# Altium PCB Battery-Cutoff.PcbDoc
Units mil, origin at the board's own origin, x right, y up, seen from the top; angles counter-clockwise.
Board outline 2362.2 x 984.25 mil, 2 copper layers (Top Layer, Bottom Layer); 9 components, 6 nets, 38 pads, 5 vias.
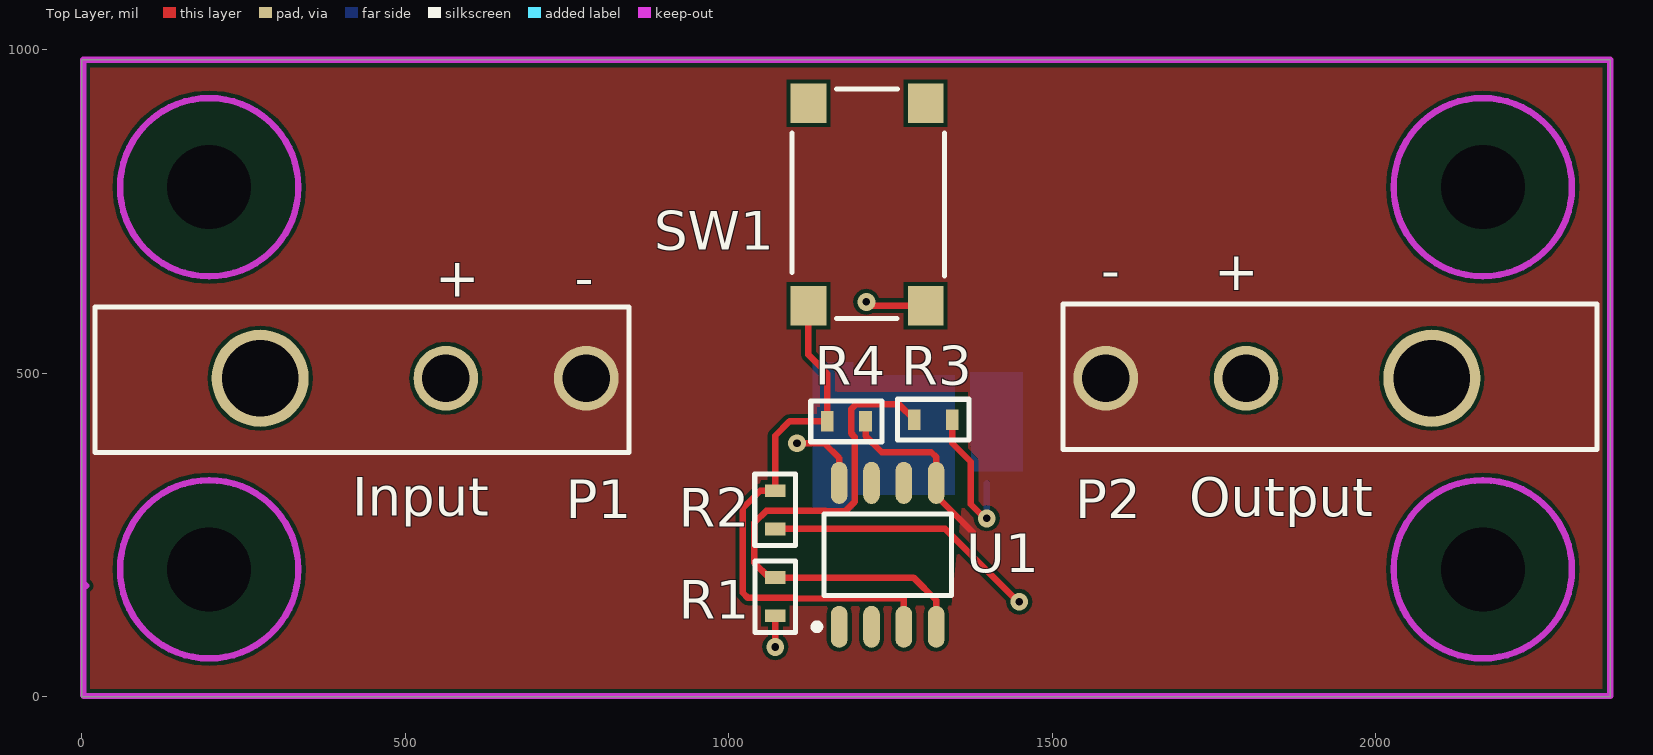
[diagram p0: Top Layer view]
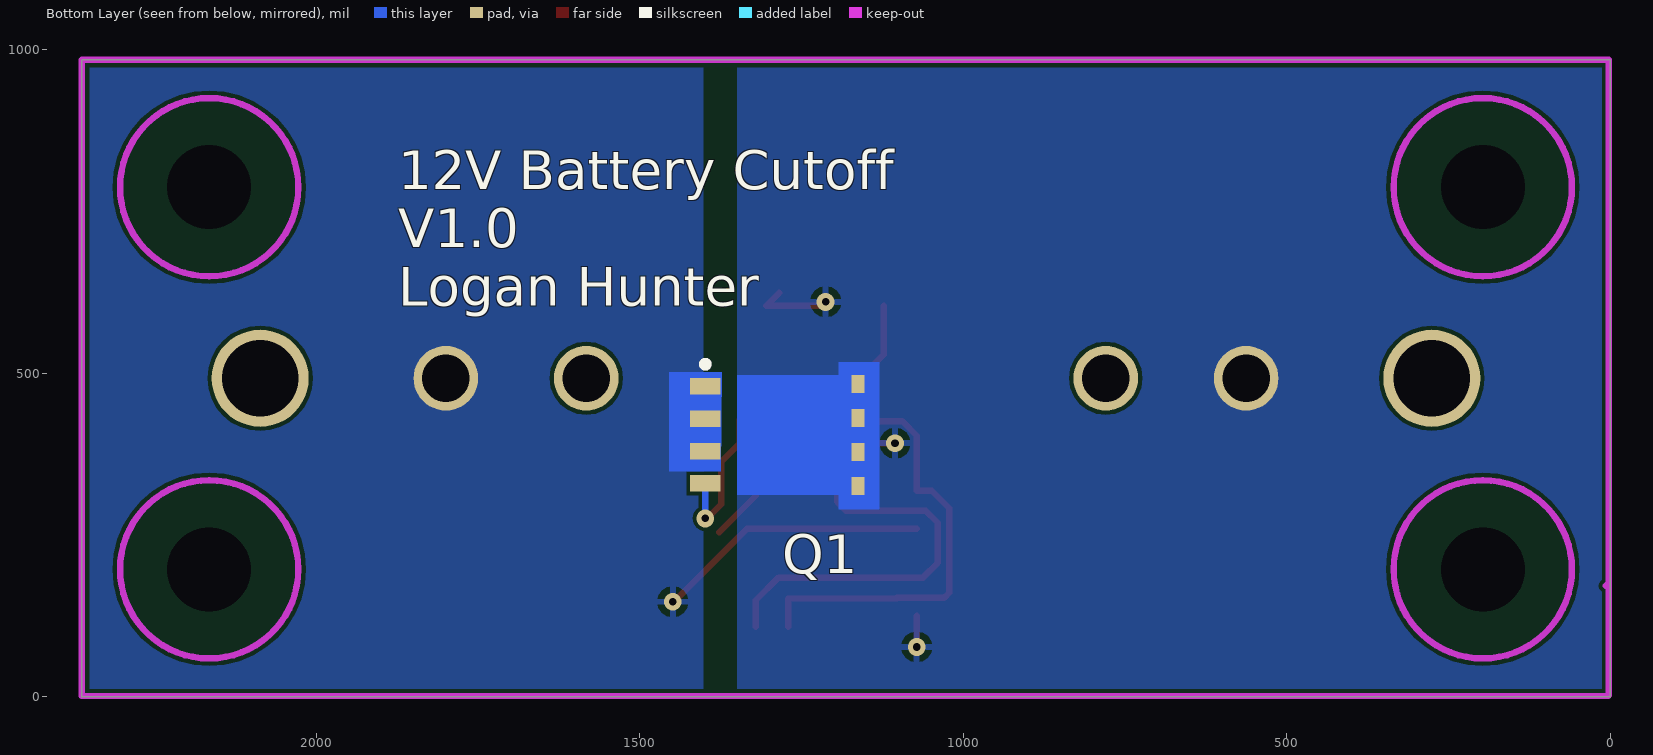
[diagram p1: Bottom Layer view, seen from below]
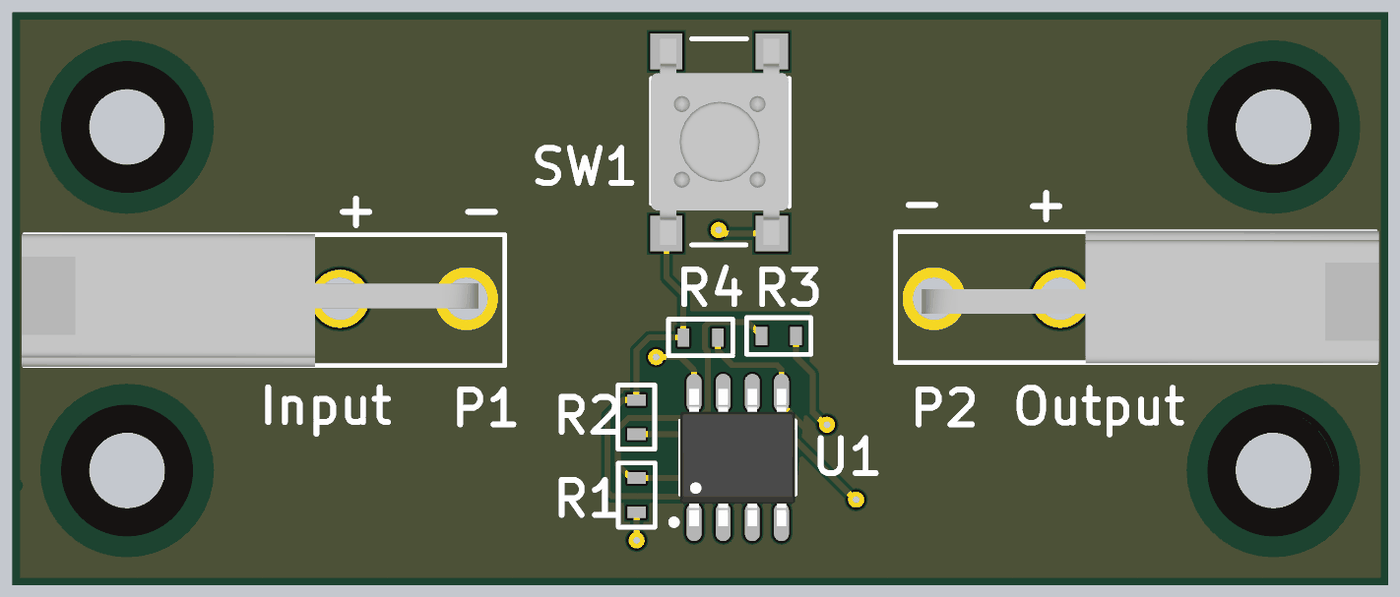
[diagram p2: 3D render of the assembled board from above, using the file's embedded part models]

## Layer stack, top to bottom
Top Solder: solder mask 0.4, Solder Resist, Dk 3.5
Top Layer: signal copper 1.4
Dielectric 1: dielectric 12.6, FR-4, Dk 4.8
Bottom Layer: signal copper 1.4
Bottom Solder: solder mask 0.4, Solder Resist, Dk 3.5

## Board outline
0,0 2362.2,0 2362.2,984.25 0,984.25

## Design rules (kind name [scope] priority, off if disabled: settings)
BoardOutlineClearance [All] p1: gap=11.81
Clearance [All] p1: gap=6
ComponentClearance [All] p1: gap=3.94 collisioncheckmode=3 verticalgap=10 showdistances=FALSE
FabricationTestPointUsage TestPointUsage [All] p1: valid=0 allowmultiple=FALSE
FabricationTestpoint Testpoint [All] p1: side=3 testpointundercomponent=TRUE minsize=40 maxsize=100 preferedsize=60 minholesize=0 maxholesize=40 preferedholesize=32 testpointgrid=1 allowsidetop=TRUE allowsidebottom=TRUE usegrid=TRUE gridtolerance=0.01
HoleSize [All] p1: absolutevalues=TRUE maxlimit=248.03 minlimit=11.81 maxpercent=80.000 minpercent=20.000
HoleToHoleClearance [All] p1: gap=17.72 allowstackedmicrovias=TRUE
MinimumAnnularRing [All] p1: minimumring=5.91
MinimumSolderMaskSliver [All] p1: minsoldermaskwidth=2.95
PlaneClearance [All] p1: clearance=19.68
PlaneConnect [All] p1: planeconnectstyle=Direct reliefexpansion=20 reliefentries=4 reliefconductorwidth=10 reliefairgap=10
PolygonConnect ThroughHole [IsThruPin] p1: connectstyle=Direct reliefconductorwidth=10 reliefentries=4 polygonreliefangle="90 Angle" airgapwidth=10
PolygonConnect "GND Via" [isVia AND InNet('GND')] p2: connectstyle=Direct reliefconductorwidth=10 reliefentries=4 polygonreliefangle="90 Angle" airgapwidth=10 // GND Via Connection
PolygonConnect [All] p3: connectstyle=Relief reliefconductorwidth=10 reliefentries=4 polygonreliefangle="90 Angle" airgapwidth=9.84
RoutingVias [All] p1: holewidth=11.81 width=23.62 viastyle="Through Hole" minholewidth=11.81 minwidth=23.62 maxholewidth=248.03 maxwidth=259.84
SilkToSilkClearance [All] p1: silktosilkclearance=5.91
SilkToSolderMaskClearance SilkscreenOverComponentPads [IsPad] p1: minsilkscreentomaskgap=9.84 clearancetoexposedcopper=TRUE
SolderMaskExpansion [All] p1: expansion=3.94
Width [All] p1: maxlimit=78.74 minlimit=6 preferedwidth=9.84 minimp=50.000000 maximp=50.000000 favimp=50.000000
20 further rules are at their usual default settings.

## Components (designator, comment, footprint, x,y, rotation, side; value= is the part's Value field where it differs from the comment)
P1 "Molex Mini-Fit 1x2" "Molex Mini-Fit Jr 2x1" 275.59,492.13 r270 top
P2 "Molex Mini-Fit 1x2" "Molex Mini-Fit Jr 2x1" 2086.61,492.13 r90 top
Q1 "INFINEON BSC030P03NS3 G" "BSC030P03NS3 G" 1280.51,404.53 r0 bottom
R1 "SCH_GENERIC_RESISTOR_0603" PCB_GENERIC_SMD_0603 1071.85,154.53 r270 top
R2 "SCH_GENERIC_RESISTOR_0603" PCB_GENERIC_SMD_0603 1071.54,288.72 r270 top
R3 "SCH_GENERIC_RESISTOR_0603" PCB_GENERIC_SMD_0603 1315.95,428.15 r0 top
R4 "SCH_GENERIC_RESISTOR_0603" PCB_GENERIC_SMD_0603 1181.76,425.51 r0 top
SW1 "Tactile Switch" "C&K 4 pin Tactile Switch" 1304.13,604.33 r90 top
U1 "Maxim MAX8212" "Maxim MAX8212" 1245.55,219.21 r90 top

## Footprints (in the part's own frame and the unit in brackets; to place one, negate y for a bottom-side part, rotate by r counter-clockwise, add the part's x,y. Pads: shape width x height; smd on the part's side, far side on the other; paste and mask are expansions set on the pad)
"BSC030P03NS3 G" [mm] "P-Channel 30V 25.4A (Ta), 100A (Tc) 2.5W (Ta), 125W (Tc) Surface Mount PG-TDSON-8"
  rect 1.2x0.65 smd: 1(3,-1.905) 2(3,-0.635) 3(3,0.635) 4(3,1.905)
  rect 0.5x0.703 smd: 5(-3,1.999) 6(-3,0.666) 7(-3,-0.666) 8(-3,-1.999)
  Top Layer region: -2.75,2.35 1.75,2.35 1.75,-2.35 -2.75,-2.35
  silkscreen extent 2.88,-2.9 3.13,-2.65
"C&K 4 pin Tactile Switch" [mm] "Digikey: CKN9085CT-ND MFG: PTS645SH50SMTR92 LFS"
  rect 1.55x1.4 smd mask+0.1: 1(0,4.6)
  rect 1.55x1.4 smd: 2(7.95,4.6) 3(0,0) 4(7.95,0)
  silkscreen extent -0.5,-0.75 8.5,5.25, body extent -0.5,-0.72 8.5,5.28, height 5
"Maxim MAX8212" [mm] "MFG: MAX8212CSA+ Digikey:  MAX8212CSA+-ND"
  oval 1.65x0.65 smd: 1(-2.825,1.905) 2(-2.825,0.635) 3(-2.825,-0.635) 4(-2.825,-1.905) 5(2.825,-1.905) 6(2.825,-0.635) 7(2.825,0.635) 8(2.825,1.905)
  silkscreen extent -2.95,-2.5 1.6,2.9, body extent -3,-2.5 3,2.5, height 1.75
"Molex Mini-Fit Jr 2x1" [mil]
  round 100 hole 73: 1(0,287) 2(0,504)
  round 150 hole 118: ""(0,0)
  silkscreen extent -110,-255 115,570, body extent -111,-260 117,525, height 449
PCB_GENERIC_SMD_0603 [mm]
  rect 0.5x0.8 smd: 1(-0.75,0) 2(0.75,0)
  silkscreen extent -1.4,-0.8 1.4,0.8, body extent -0.75,-0.5 0.75,0.5, height 0.45

## Part data
Q1: library part "BSC030P03NS3 G", "P-Channel 30V 25.4A (Ta), 100A (Tc) 2.5W (Ta), 125W (Tc) Surface Mount PG-TDSON-8"
R1 R2 R3 R4: "Generic SMD resistor 0603"
SW1: library part "C&K Tactile Switch"

## Free pads (board coordinates)
  round 0 hole 129.92 unplated: ""(196.85,196.85) ""(196.85,787.4) ""(2165.35,196.85) ""(2165.35,787.4)

## Via types
v1: diameter 27.56, hole 11.81, Top Layer to Bottom Layer, 5 vias

## Nets (pads, with @x,y where several pads share a name; then routed paths per layer and width w, separated by ;. In a path a pad name is that pad's centre, name@x,y a point inside that pad or via, vN(x,y) a via of type N, cw(c..) or ccw(c..) an arc to the next point about the centre after c; other vN are vias at no path point)
GND: P1.2 P2.2 R4.2 U1.5 | length 285.2
  Top Layer w10: R4.2 1211.29,402.88 1236.22,377.95 1312.99,377.95 1320.55,370.39 U1.5 1320.55,310.35 1376.97,253.94
NetP1_1: P1.1 Q1.5 Q1.6 Q1.7 Q1.8 R1.2 SW1.3 U1.8 | length 283.2
  Top Layer w10: v1(1071.85,76.77) R1.2 ; v1(1105.32,391.73) 1147.64,391.73 1170.55,368.82 U1.8 ; v1(1212.6,610.24) 1218.5,604.33 SW1.3 SW1.3@1284.45,624.02
NetP2_1: P2.1 Q1.1 Q1.2 Q1.3 R2.2 | length 423.9
  Top Layer w10: R2.2 1334.31,259.19 1446.85,146.65 v1(1448.82,146.65)
NetQ1_4: Q1.4 R3.2 | length 230.2
  Top Layer w10: R3.2 1345.48,391.72 1374.02,363.18 1374.02,297.24 1395.67,275.59 v1(1398.62,275.59)
  Bottom Layer w10: v1(1398.62,275.59) Q1.4
NetR1_1: R1.1 R3.1 U1.4 | length 833.1
  Top Layer w10: R3.1 1262.31,452.26 1196.89,452.26 1188.98,444.34 1188.98,407.48 1190.45,406.01 1190.45,405.21 1194.35,401.31 1194.35,300.89 1180.41,286.95 1149.2,286.95 1148.75,287.4 1058.07,287.4 1039.37,268.7 1039.37,206.69 1062,184.06 R1.1 1285.43,184.06 1320.55,148.94 U1.4
NetR2_1: R2.1 R4.1 SW1.1 U1.3 | length 853.6
  Top Layer w10: 1102.29,151.69 1270.55,151.69 U1.3 ; 1102.29,152.56 1029.53,152.56 1021.65,160.43 1021.65,291.34 1048.56,318.25 R2.1 1071.54,403.23 1093.82,425.51 R4.1 1152.24,499.34 1123.03,528.54 SW1.1
pads on no net: P1. P2. SW1.2 SW1.4 U1.1 U1.2 U1.6 U1.7

## Polygon pours and split planes (outlines as drawn)
NetP1_1 on Bottom Layer "12VIn" (solid, remove dead copper, pour order 8): 0,984.25 1349.41,984.25 1349.41,0 0,0
NetP2_1 on Bottom Layer "12VOut" (solid, remove dead copper, pour order 12): 1401.57,984.25 1401.57,0 2519.68,0 2519.68,984.25
GND on Top Layer "GND" (solid, remove dead copper, pour order 14): 0,984.25 0,0 2362.2,0 2362.2,984.25

## Keep-outs
Keep-Out Layer:
  circle w10: c196.85,787.4 r137.8
  circle w10: c196.85,196.85 r137.8
  circle w10: c2165.35,196.85 r137.8
  circle w10: c2165.35,787.4 r137.8
  lines w10: 1.97,1.97 1.97,984.25 2362.2,984.25 2362.2,0.98 2.95,0.98 ; 4.92,171.26 5.91,172.24 6.89,171.26

## Other copper
Top Layer:
  pour cut-out: 1049.19,287.4 1168.31,470.47 1369.09,470.47 1369.09,383.97 1343.5,140.91 1049.19,140.91
Bottom Layer:
  region net NetP1_1: 1129.92,516.73 1129.92,289.37 1191.93,289.37 1191.93,516.73
  region net NetP2_1: 1373.47,501.67 1454.04,501.67 1454.04,348.43 1374.49,348.43

## Silkscreen, mask and mechanical layers (free items; w line width, h text height)
Top Overlay:
  text "-" at 1605.31,629.92 h60
  text "+" at 1818.9,627.95 h60
  text "+" at 546.26,618.11 h60
  text "-" at 761.81,618.11 h60
  text "Input" at 418.31,279.53 h60
  text "Output" at 1711.61,278.54 h60
Bottom Overlay:
  text "12V Battery Cutoff / V1.0 / Logan Hunter" at 1873.03,604.33 h60
Top Solder:
  circle w10: c196.85,787.4 r108.27
  circle w10: c196.85,196.85 r108.27
  circle w10: c2165.35,196.85 r108.27
  circle w10: c2165.35,787.4 r108.27
  region: 199.31,678.27 cw(c199.31,786.53) 91.04,786.53 cw(c199.31,786.53) 199.31,894.8 cw(c199.31,786.53) 307.57,786.53 cw(c199.31,786.53)
  region: 200.54,91.01 cw(c200.54,199.28) 92.27,199.28 cw(c200.54,199.28) 200.54,307.55 cw(c200.54,199.28) 308.81,199.28 cw(c200.54,199.28)
  region: 2160.43,85.37 cw(c2160.43,193.64) 2052.17,193.64 cw(c2160.43,193.64) 2160.43,301.91 cw(c2160.43,193.64) 2268.7,193.64 cw(c2160.43,193.64)
  region: 2164.33,680.84 cw(c2164.33,789.11) 2056.07,789.11 cw(c2164.33,789.11) 2164.33,897.37 cw(c2164.33,789.11) 2272.6,789.11 cw(c2164.33,789.11)
Bottom Solder:
  region: 197.59,679.26 cw(c197.59,787.53) 89.33,787.53 cw(c197.59,787.53) 197.59,895.8 cw(c197.59,787.53) 305.86,787.53 cw(c197.59,787.53)
  region: 195.87,88.19 cw(c195.87,196.46) 87.6,196.46 cw(c195.87,196.46) 195.87,304.73 cw(c195.87,196.46) 304.13,196.46 cw(c195.87,196.46)
  region: 2165.62,87.63 cw(c2165.62,195.9) 2057.35,195.9 cw(c2165.62,195.9) 2165.62,304.17 cw(c2165.62,195.9) 2273.89,195.9 cw(c2165.62,195.9)
  region: 2165.71,680.06 cw(c2165.71,788.33) 2057.44,788.33 cw(c2165.71,788.33) 2165.71,896.6 cw(c2165.71,788.33) 2273.97,788.33 cw(c2165.71,788.33)